# Altium PCB MOD-14_22-SMD-L21-W18-P2.54-LS16-TR-EP_XIAO_ESP32C3.pcbdoc
Units mm, origin at the board's own origin, x right, y up, seen from the top; angles counter-clockwise.
Board outline 53.6 x 44.65 mm, 2 copper layers (Top Layer, Bottom Layer); 1 components, 0 nets, 23 pads, 0 vias.
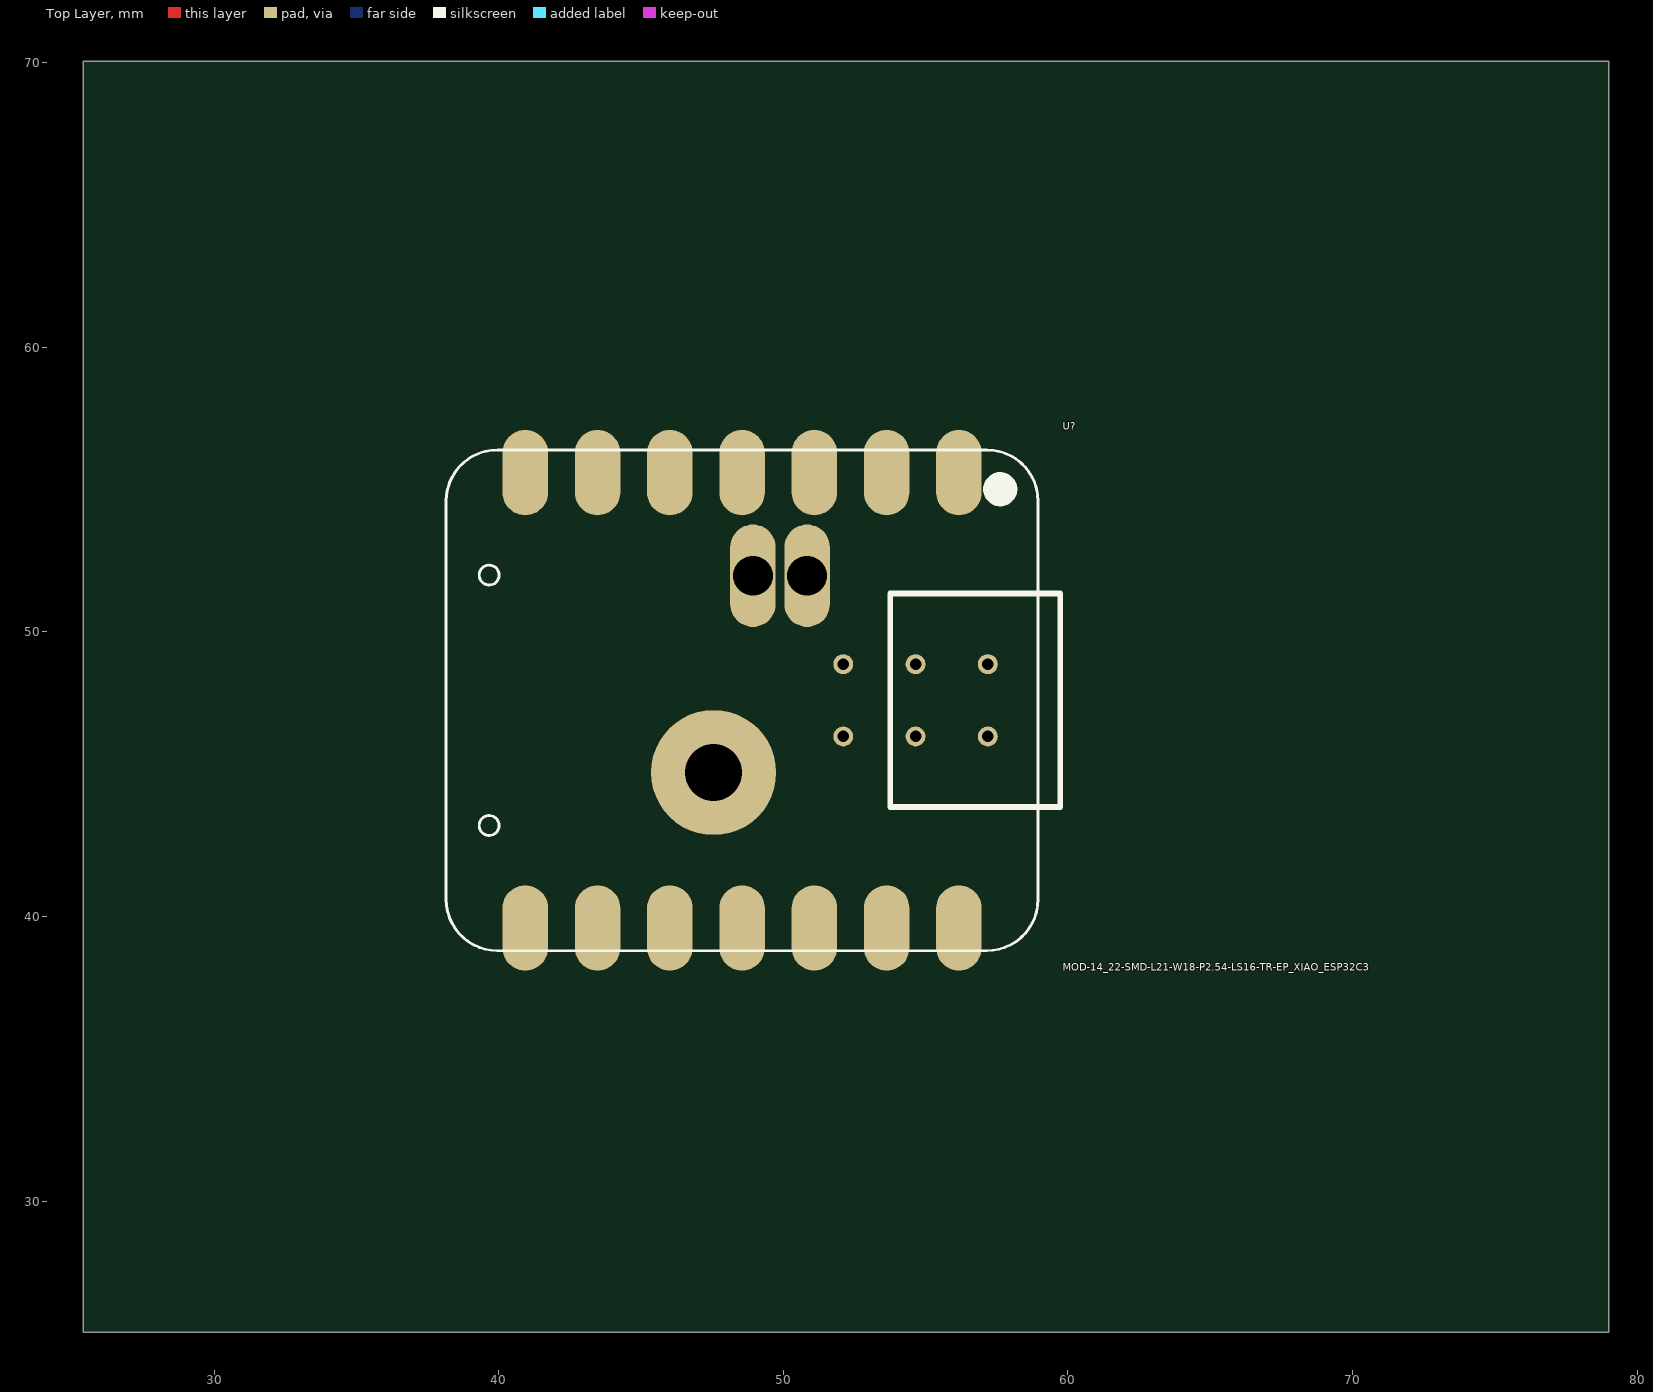
[diagram p0: Top Layer view]
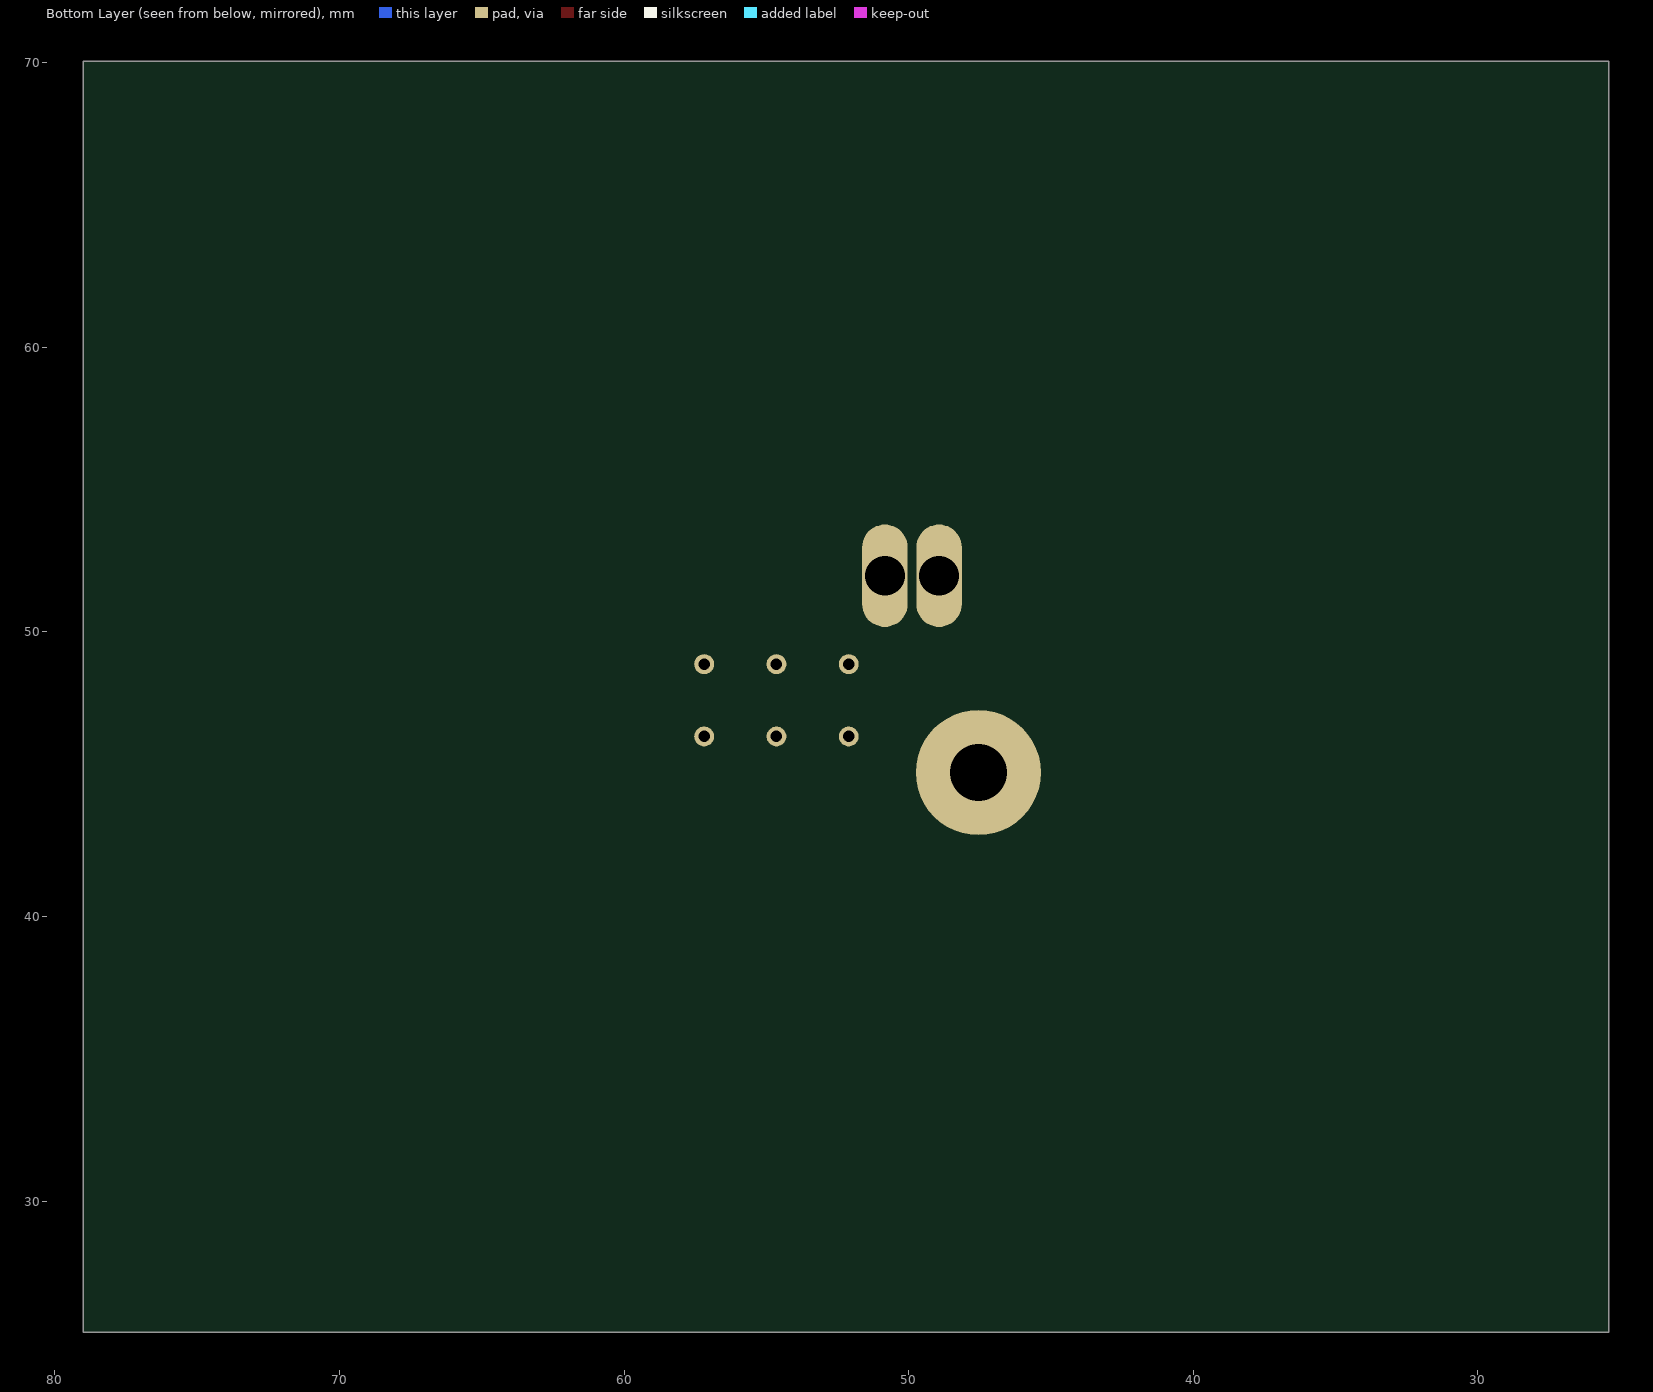
[diagram p1: Bottom Layer view, seen from below]

## Layer stack, top to bottom
Top Layer: signal copper (thickness not stored)
Dielectric: dielectric 0.32, FR-4, Dk 4.8
Bottom Layer: signal copper (thickness not stored)

## Board outline
79.003,25.4 25.4,25.4 25.4,70.054 79.003,70.054

## Components (designator, comment, footprint, x,y, rotation, side; value= is the part's Value field where it differs from the comment)
U? "MOD-14_22-SMD-L21-W18-P2.54-LS16-TR-EP_XIAO_ESP32C3" MOD-14_22-SMD-L21-W18-P2.54-LS16-TR-EP_XIAO_ESP32C3 48.963,47.6 r0 top

## Footprints (in the part's own frame and the unit in brackets; to place one, negate y for a bottom-side part, rotate by r counter-clockwise, add the part's x,y. Pads: shape width x height; smd on the part's side, far side on the other; paste and mask are expansions set on the pad)
MOD-14_22-SMD-L21-W18-P2.54-LS16-TR-EP_XIAO_ESP32C3 [mm]
  oval 1.6x3 smd paste+0.102 mask+0.051: 1(7.207,8) 2(4.667,8) 3(2.127,8) 4(-0.413,8) 5(-2.953,8) 6(-5.493,8) 7(-8.033,8) 8(-8.033,-8) 9(-5.493,-8) 10(-2.953,-8) 11(-0.413,-8) 12(2.127,-8) 13(4.667,-8) 14(7.207,-8)
  oval 1.6x3.6 hole 1.4 paste+0.102 mask+0.051: BAT+(-0.032,4.377) BAT-(1.873,4.377)
  round 4.4 hole 2 paste+0 mask+0.051: Thermal(-1.413,-2.54)
  round 0.7 hole 0.4 paste+0.102 mask+0.051: TP1(5.683,-1.27) TP2(3.143,1.27) TP3(8.223,1.27) TP4(3.143,-1.27) TP5(8.223,-1.27) TP6(5.683,1.27)
  silkscreen extent -10.81,-8.8 10.76,8.8

## Nets (pads, with @x,y where several pads share a name; then routed paths per layer and width w, separated by ;. In a path a pad name is that pad's centre, name@x,y a point inside that pad or via, vN(x,y) a via of type N, cw(c..) or ccw(c..) an arc to the next point about the centre after c; other vN are vias at no path point)
pads on no net: U?.1 U?.2 U?.3 U?.4 U?.5 U?.6 U?.7 U?.8 U?.9 U?.10 U?.11 U?.12 U?.13 U?.14 U?.BAT+ U?.BAT- U?.Thermal U?.TP1 U?.TP2 U?.TP3 U?.TP4 U?.TP5 U?.TP6

## Silkscreen, mask and mechanical layers (free items; w line width, h text height)
Document:
  lines w0.003: 52.201,47.727 52.202,47.727